# Altium PCB PCB1_2.pcbdoc (part 2 of 2)
Units mil, origin at the board's own origin, x right, y up, seen from the top; angles counter-clockwise.
Board outline 3210 x 4490.62 mil, 2 copper layers (Top Layer, Bottom Layer); 32 components, 15 nets, 80 pads, 138 vias.
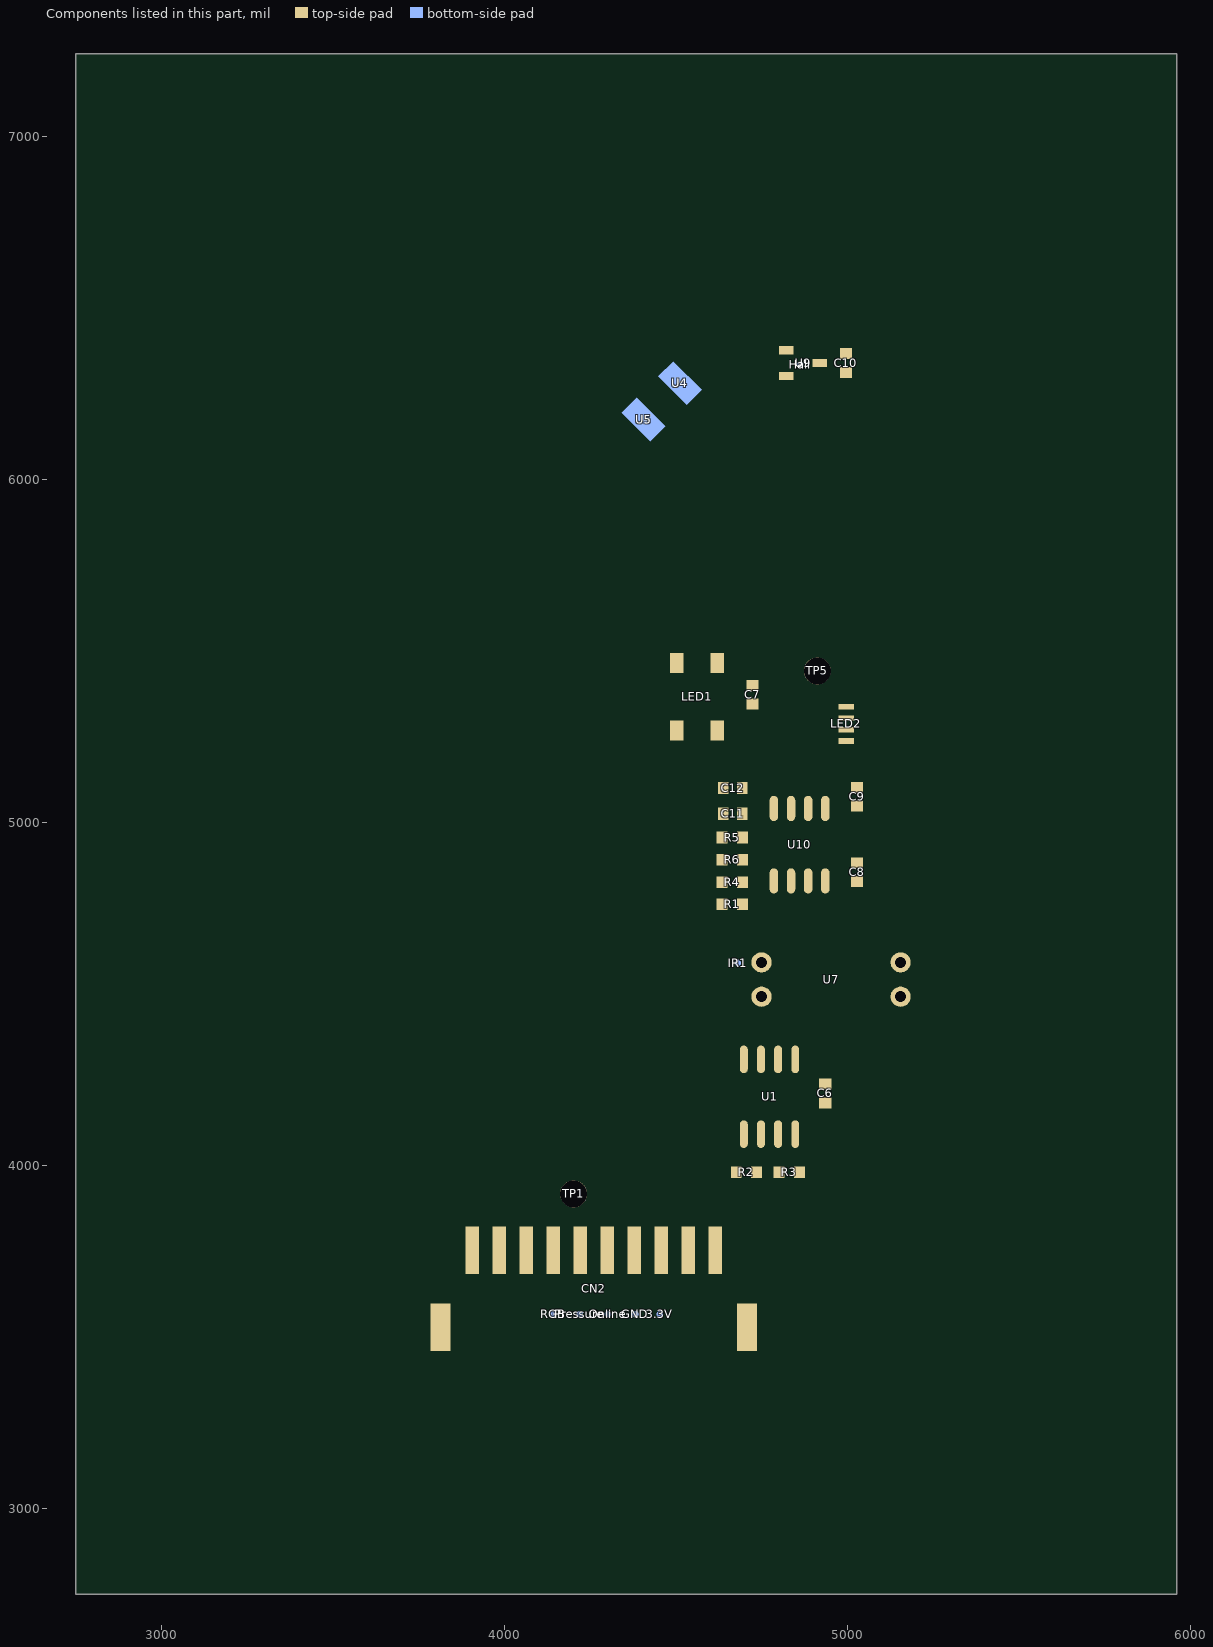
[diagram p2: the components of this part, seen from the top]

## Other copper (continued)
Bottom Layer:
  region net GND: 5114.28,4586.73 5114.28,4596.73 5116.54,4596.83 5118.49,4597.12 5120.17,4597.58 5121.61,4598.2 5122.86,4598.98 5123.96,4599.89 5125.83,4602.09 5129.44,4607.58 5131.81,4610.68 5133.26,4612.27 5134.95,4613.88 5134.95,4569.58 5133.26,4571.19 5131.81,4572.78 5129.44,4575.88 5125.83,4581.37 5123.96,4583.57 5122.86,4584.48 5121.61,4585.26 5120.17,4585.88 5118.49,4586.34 5116.54,4586.63
  region net 3.3V: 4900,3994.53 4920,3994.53 4920.09,3991.88 4920.31,3989.38 4921,3985 4921.69,3981.78 4922.01,3980.12 4897.99,3980.12 4898.31,3981.78 4899,3985 4899.69,3989.38 4899.91,3991.88
  region net 3.3V: 4920,3965.71 4900,3965.71 4899.91,3968.36 4899.69,3970.86 4899,3975.24 4898.31,3978.46 4897.99,3980.12 4922.01,3980.12 4921.69,3978.46 4921,3975.24 4920.31,3970.86 4920.09,3968.36
  region net 3.3V: 4900.09,4389.06 4891.91,4368.95 4890.95,4370.07 4890.18,4371.23 4888.89,4373.32 4888.22,4374.09 4887.45,4374.55 4886.5,4374.62 4885.29,4374.22 4890.31,4391.16 4890.8,4390.47 4891.32,4389.99 4891.86,4389.68 4892.42,4389.52 4893.6,4389.54 4894.83,4389.83 4896.11,4390.15 4897.43,4390.27 4898.76,4389.99 4899.42,4389.62
  region net 3.3V: 4855.18,4395 4855.18,4375 4852.54,4374.91 4850.03,4374.69 4845.65,4374 4842.43,4373.31 4840.77,4372.99 4840.77,4397.01 4842.43,4396.69 4845.65,4396 4850.03,4395.31 4852.54,4395.09
  region net 3.3V: 4865.59,4375 4865.59,4395 4868.24,4395.09 4870.74,4395.31 4875.12,4396 4878.34,4396.69 4880,4397.01 4880,4372.99 4878.34,4373.31 4875.12,4374 4870.74,4374.69 4868.24,4374.91
  region net GND: 4852.56,4962.14 4842.56,4962.14 4842.47,4963.27 4842.22,4964.41 4841.31,4966.62 4840.02,4968.7 4838.55,4970.54 4856.57,4970.54 4855.1,4968.7 4853.81,4966.62 4852.9,4964.41 4852.65,4963.27
  region net GND: 4842.56,4994.83 4852.56,4994.83 4852.65,4993.69 4852.9,4992.56 4853.81,4990.34 4855.1,4988.27 4856.57,4986.43 4838.55,4986.43 4840.02,4988.27 4841.31,4990.34 4842.22,4992.56 4842.47,4993.69
  region net GND: 4882.56,4586.73 ccw(c4882.56,4536.73) 4852.56,4576.73 4847.56,4591.73 4852.56,4606.73 ccw(c4882.56,4646.73) 4882.56,4596.73
  region net HALL_OUT: 4837.72,6340 4837.72,6330 4836.59,6329.91 4835.45,6329.66 4833.24,6328.75 4831.16,6327.47 4829.32,6325.99 4829.32,6344.01 4831.16,6342.53 4833.24,6341.25 4835.45,6340.34 4836.59,6340.09
  region net HALL_OUT: 4848.81,6330 4848.96,6340 4850.7,6340.17 4852.6,6340.66 4854.4,6341.4 4855.85,6342.35 4855.7,6327.58 4854.26,6328.55 4852.45,6329.32 4850.55,6329.82
  region net 3.3V: 4826.36,4375 4826.36,4395 4829.01,4395.09 4831.51,4395.31 4835.89,4396 4839.11,4396.69 4840.77,4397.01 4840.77,4372.99 4839.11,4373.31 4835.89,4374 4831.51,4374.69 4829.01,4374.91
  region net 3.3V: 4814.41,4395 4814.41,4375 4811.76,4374.91 4809.26,4374.69 4804.88,4374 4801.66,4373.31 4800,4372.99 4800,4397.01 4801.66,4396.69 4804.88,4396 4809.26,4395.31 4811.76,4395.09
  region net 3.3V: 4813,5298.65 4807,5298.65 4806.87,5300.18 4806.48,5301.4 4805.89,5302.41 4805.12,5303.28 4803.2,5304.95 4800.99,5307.06 4819.01,5307.06 4816.8,5304.95 4814.88,5303.28 4814.11,5302.41 4813.52,5301.4 4813.13,5300.18
  region net 3.3V: 4807,4770.76 4813,4770.76 4813.13,4769.24 4813.52,4768.01 4814.11,4767.01 4814.88,4766.14 4816.8,4764.47 4819.01,4762.36 4800.99,4762.36 4803.2,4764.47 4805.12,4766.14 4805.89,4767.01 4806.48,4768.01 4806.87,4769.24
  region net 3.3V: 4815,4738.07 4805,4738.07 4804.91,4739.21 4804.66,4740.34 4803.75,4742.56 4802.47,4744.63 4800.99,4746.47 4819.01,4746.47 4817.53,4744.63 4816.25,4742.56 4815.34,4740.34 4815.09,4739.21
  region net MCU_SCL: 4803,4013.65 4797,4013.65 4796.87,4015.18 4796.48,4016.4 4795.89,4017.41 4795.12,4018.28 4793.2,4019.95 4790.99,4022.06 4809.01,4022.06 4806.8,4019.95 4804.88,4018.28 4804.11,4017.41 4803.52,4016.4 4803.13,4015.18
  region net K_ONLINE: 4790,4928.65 4780,4928.65 4779.91,4929.79 4779.66,4930.92 4778.75,4933.14 4777.47,4935.21 4775.99,4937.06 4794.01,4937.06 4792.53,4935.21 4791.25,4933.14 4790.34,4930.92 4790.09,4929.79
  region net GND: 4789.18,4496.73 4789.18,4486.73 4786.92,4486.63 4784.97,4486.34 4783.29,4485.88 4781.85,4485.26 4780.6,4484.48 4779.5,4483.57 4777.63,4481.37 4774.02,4475.88 4771.65,4472.78 4770.2,4471.19 4768.51,4469.58 4768.51,4513.88 4770.2,4512.27 4771.65,4510.68 4774.02,4507.58 4777.63,4502.09 4779.5,4499.89 4780.6,4498.98 4781.85,4498.2 4783.29,4497.58 4784.97,4497.12 4786.92,4496.83
  region net 3.3V: 4784.73,4391.61 4790.61,4399.87 4791.48,4399.14 4792.49,4398.52 4794.79,4397.61 4797.26,4397.11 4799.63,4397 4788.14,4383.13 4787.71,4385.42 4787.06,4387.69 4786.11,4389.8 4785.48,4390.75
  region net MCU_SDA: 4748,4013.65 4742,4013.65 4741.87,4015.18 4741.48,4016.4 4740.89,4017.41 4740.12,4018.28 4738.2,4019.95 4735.99,4022.06 4754.01,4022.06 4751.8,4019.95 4749.88,4018.28 4749.11,4017.41 4748.52,4016.4 4748.13,4015.18
  region net GND: 4761.53,5285.35 4750.93,5295.95 4752.66,5297.58 4754.17,5299.09 4754.79,5299.9 4755.29,5300.79 4755.63,5301.8 4755.8,5302.96 4768.54,5290.23 4767.38,5290.05 4766.37,5289.71 4765.48,5289.22 4764.67,5288.6 4763.16,5287.08
  region net IR1_RECV: 4693.08,4593 4693.08,4587 4691.93,4586.9 4690.95,4586.62 4690.1,4586.19 4689.32,4585.63 4686.19,4582.62 4686.19,4597.38 4689.32,4594.37 4690.1,4593.81 4690.95,4593.38 4691.93,4593.1
  region net IR1_RECV: 4710.1,4587 4707.51,4593 4709.94,4593.11 4712,4593.44 4713.76,4593.97 4715.24,4594.69 4716.5,4595.58 4717.58,4596.64 4718.52,4597.83 4719.36,4599.15 4722.73,4605.46 4725.01,4609.02 4726.46,4610.85 4728.18,4612.7 4730.77,4568.48 4728.5,4570.6 4726.1,4573.32 4721.04,4579.47 4718.39,4582.36 4715.67,4584.76 4714.29,4585.69 4712.91,4586.39 4711.51,4586.84
  region net RGB_OUT: 4614.54,5176.88 4607.46,5183.95 4608.12,5184.74 4608.52,5185.49 4608.71,5186.25 4608.76,5187.02 4608.64,5188.72 4608.6,5190.75 4621.33,5178.02 4619.3,5178.06 4617.6,5178.18 4616.83,5178.13 4616.08,5177.94 4615.32,5177.54
  region net MOTOR_LOUT: 4539.14,3883.02 4536.16,3903.02 4539.38,3902.95 4542.32,3903.05 4543.69,3903.31 4544.99,3903.78 4546.21,3904.52 4547.36,3905.59 4550.34,3881.78 4548.93,3882.59 4547.61,3883.09 4546.33,3883.33 4545.04,3883.39 4542.32,3883.19
  region net 3.3V: 4471,3660 4471,3640 4468.36,3639.91 4465.85,3639.69 4461.47,3639 4458.25,3638.31 4456.59,3637.99 4456.59,3662.01 4458.25,3661.69 4461.47,3661 4465.85,3660.31 4468.36,3660.09
  region net MOTOR_HOUT: 4535.33,3953.22 4515.33,3953.22 4515.44,3956.38 4515.44,3959.24 4515.26,3960.58 4514.89,3961.88 4514.27,3963.16 4513.33,3964.42 4537.33,3964.42 4536.4,3963.16 4535.77,3961.88 4535.4,3960.58 4535.23,3959.24 4535.23,3956.38
  region net MOTOR_HOUT: 4515.33,3946.78 4535.33,3946.78 4535.23,3943.62 4535.23,3940.76 4535.4,3939.42 4535.77,3938.12 4536.4,3936.84 4537.33,3935.58 4513.33,3935.58 4514.27,3936.84 4514.89,3938.12 4515.26,3939.42 4515.44,3940.76 4515.44,3943.62
  region net 3.3V: 4446.59,3629.41 4466.59,3629.41 4466.68,3626.76 4466.91,3624.26 4467.6,3619.88 4468.29,3616.66 4468.6,3615 4444.59,3615 4444.9,3616.66 4445.59,3619.88 4446.28,3624.26 4446.51,3626.76
  region net 3.3V: 4466.59,3635.59 4446.59,3635.59 4446.51,3638.24 4446.28,3640.74 4445.59,3645.12 4444.9,3648.34 4444.59,3650 4468.6,3650 4468.29,3648.34 4467.6,3645.12 4466.91,3640.74 4466.68,3638.24
  region net 3.3V: 4466.59,3600.59 4446.59,3600.59 4446.51,3603.24 4446.28,3605.74 4445.59,3610.12 4444.9,3613.34 4444.59,3615 4468.6,3615 4468.29,3613.34 4467.6,3610.12 4466.91,3605.74 4466.68,3603.24
  region net 3.3V: 4446.59,3578.72 4466.59,3578.94 4466.5,3578.29 4466.23,3577.71 4465.31,3576.72 4464.04,3575.91 4462.65,3575.2 4461.37,3574.54 4460.42,3573.84 4460.14,3573.45 4460.02,3573.03 4460.11,3572.57 4460.41,3572.05 4444.75,3571.84 4445.59,3573.35 4446.16,3575.12 4446.49,3576.97
  region net GND: 4367.85,3629.41 4387.85,3629.41 4387.94,3626.76 4388.17,3624.26 4388.86,3619.88 4389.55,3616.66 4389.86,3615 4365.85,3615 4366.16,3616.66 4366.85,3619.88 4367.54,3624.26 4367.77,3626.76
  region net GND: 4387.85,3635.59 4367.85,3635.59 4367.77,3638.24 4367.54,3640.74 4366.85,3645.12 4366.16,3648.34 4365.85,3650 4389.86,3650 4389.55,3648.34 4388.86,3645.12 4388.17,3640.74 4387.94,3638.24
  region net GND: 4387.85,3600.59 4367.85,3600.59 4367.77,3603.24 4367.54,3605.74 4366.85,3610.12 4366.16,3613.34 4365.85,3615 4389.86,3615 4389.55,3613.34 4388.86,3610.12 4388.17,3605.74 4387.94,3603.24
  region net GND: 4367.85,3579.47 4387.85,3578.15 4387.96,3576.44 4388.28,3574.59 4388.81,3572.79 4389.56,3571.26 4373.95,3572.58 4374.26,3573.04 4374.35,3573.47 4374.24,3573.87 4373.96,3574.25 4373.03,3574.98 4371.76,3575.7 4370.39,3576.46 4369.13,3577.31 4368.21,3578.3 4367.95,3578.86
  region net K_ONLINE: 4307.14,3665.1 4314.21,3658.02 4313.47,3657.16 4312.85,3656.17 4311.92,3653.97 4311.36,3651.59 4311.1,3649.25 4298.36,3661.98 4300.71,3662.25 4303.08,3662.81 4305.29,3663.73 4306.27,3664.35
  region net K_ONLINE: 4309.11,3635.59 4289.11,3635.59 4289.03,3638.24 4288.8,3640.74 4288.11,3645.12 4287.42,3648.34 4287.11,3650 4311.12,3650 4310.81,3648.34 4310.12,3645.12 4309.43,3640.74 4309.2,3638.24
  region net K_ONLINE: 4289.11,3629.41 4309.11,3629.41 4309.2,3626.76 4309.43,3624.26 4310.12,3619.88 4310.81,3616.66 4311.12,3615 4287.11,3615 4287.42,3616.66 4288.11,3619.88 4288.8,3624.26 4289.03,3626.76
  region net K_ONLINE: 4309.11,3600.59 4289.11,3600.59 4289.03,3603.24 4288.8,3605.74 4288.11,3610.12 4287.42,3613.34 4287.11,3615 4311.12,3615 4310.81,3613.34 4310.12,3610.12 4309.43,3605.74 4309.2,3603.24
  region net K_ONLINE: 4289.11,3580.73 4309.11,3576.49 4309.22,3574.89 4309.51,3573 4309.92,3571.13 4310.41,3569.6 4295.33,3573.84 4295.64,3574.18 4295.73,3574.52 4295.61,3574.88 4295.33,3575.25 4294.38,3576.03 4293.09,3576.86 4291.69,3577.74 4290.41,3578.68 4289.48,3579.68 4289.21,3580.2
  region net K_PULL: 4228.4,3665.1 4235.47,3658.02 4234.73,3657.16 4234.11,3656.17 4233.18,3653.97 4232.62,3651.59 4232.36,3649.25 4219.62,3661.98 4221.97,3662.25 4224.34,3662.81 4226.55,3663.73 4227.53,3664.35
  region net GND: 4226.44,3510 4226.44,3490 4223.79,3489.91 4221.29,3489.69 4216.91,3489 4213.69,3488.31 4212.03,3487.99 4212.03,3512.01 4213.69,3511.69 4216.91,3511 4221.29,3510.31 4223.79,3510.09
  region net K_PULL: 4230.37,3600.59 4210.37,3600.59 4210.29,3603.24 4210.06,3605.74 4209.37,3610.12 4208.68,3613.34 4208.37,3615 4232.38,3615 4232.07,3613.34 4231.38,3610.12 4230.69,3605.74 4230.46,3603.24
  region net K_PULL: 4210.37,3575.22 4230.37,3581.46 4230.27,3580.96 4229.99,3580.46 4229.02,3579.45 4226.2,3577.51 4224.84,3576.62 4223.83,3575.82 4223.39,3575.13 4223.46,3574.83 4223.77,3574.57 4209.4,3568.33 4210.07,3571.75
  region net K_PULL: 4230.37,3635.59 4210.37,3635.59 4210.29,3638.24 4210.06,3640.74 4209.37,3645.12 4208.68,3648.34 4208.37,3650 4232.38,3650 4232.07,3648.34 4231.38,3645.12 4230.69,3640.74 4230.46,3638.24
  region net K_PULL: 4210.37,3629.41 4230.37,3629.41 4230.46,3626.76 4230.69,3624.26 4231.38,3619.88 4232.07,3616.66 4232.38,3615 4208.37,3615 4208.68,3616.66 4209.37,3619.88 4210.06,3624.26 4210.29,3626.76
  region net RGB_OUT: 4149.66,3665.1 4156.73,3658.02 4155.99,3657.16 4155.37,3656.17 4154.44,3653.97 4153.88,3651.59 4153.62,3649.25 4140.88,3661.98 4143.23,3662.25 4145.6,3662.81 4147.81,3663.73 4148.79,3664.35
  region net GND: 4197.62,3490 4197.62,3510 4200.27,3510.09 4202.77,3510.31 4207.15,3511 4210.37,3511.69 4212.03,3512.01 4212.03,3487.99 4210.37,3488.31 4207.15,3489 4202.77,3489.69 4200.27,3489.91
  region net GND: 4191.44,3510 4191.44,3490 4188.79,3489.91 4186.29,3489.69 4181.91,3489 4178.69,3488.31 4177.03,3487.99 4177.03,3512.01 4178.69,3511.69 4181.91,3511 4186.29,3510.31 4188.79,3510.09
  region net GND: 4169.53,3516.35 4184.53,3516.35 4184.45,3513.97 4184.45,3511.83 4184.59,3510.82 4184.87,3509.84 4185.33,3508.89 4186.03,3507.94 4168.02,3507.94 4168.72,3508.89 4169.19,3509.84 4169.47,3510.82 4169.61,3511.83 4169.61,3513.97
  region net GND: 4066.01,3667.26 4080.15,3653.12 4078.34,3651.19 4076.73,3649.25 4074.12,3645.67 4072.34,3642.9 4071.38,3641.51 4054.4,3658.49 4055.8,3659.44 4058.56,3661.23 4062.15,3663.84 4064.08,3665.45
  region net RGB_OUT: 4131.63,3629.41 4151.63,3629.41 4151.72,3626.76 4151.95,3624.26 4152.64,3619.88 4153.33,3616.66 4153.64,3615 4129.63,3615 4129.94,3616.66 4130.63,3619.88 4131.32,3624.26 4131.55,3626.76
  region net RGB_OUT: 4151.63,3635.59 4131.63,3635.59 4131.55,3638.24 4131.32,3640.74 4130.63,3645.12 4129.94,3648.34 4129.63,3650 4153.64,3650 4153.33,3648.34 4152.64,3645.12 4151.95,3640.74 4151.72,3638.24
  region net RGB_OUT: 4151.63,3600.59 4131.63,3600.59 4131.55,3603.24 4131.32,3605.74 4130.63,3610.12 4129.94,3613.34 4129.63,3615 4153.64,3615 4153.33,3613.34 4152.64,3610.12 4151.95,3605.74 4151.72,3603.24
  region net RGB_OUT: 4131.63,3573.25 4151.63,3582.49 4151.52,3582.06 4151.19,3581.59 4150.04,3580.56 4146.69,3578.4 4143.74,3576.57 4143.08,3575.94 4143.08,3575.73 4143.34,3575.6 4131.42,3566.36
  region net GND: 4162.62,3490 4162.62,3510 4165.27,3510.09 4167.77,3510.31 4172.15,3511 4175.37,3511.69 4177.03,3512.01 4177.03,3487.99 4175.37,3488.31 4172.15,3489 4167.77,3489.69 4165.27,3489.91
  region net GND: 4072.89,3600.59 4052.89,3600.59 4052.81,3603.24 4052.58,3605.74 4051.89,3610.12 4051.2,3613.34 4050.89,3615 4074.9,3615 4074.59,3613.34 4073.9,3610.12 4073.21,3605.74 4072.98,3603.24
  region net GND: 4052.89,3629.41 4072.89,3629.41 4072.98,3626.76 4073.21,3624.26 4073.9,3619.88 4074.59,3616.66 4074.9,3615 4050.89,3615 4051.2,3616.66 4051.89,3619.88 4052.58,3624.26 4052.81,3626.76
  region net GND: 4072.89,3635.59 4052.89,3635.59 4052.81,3638.24 4052.58,3640.74 4051.89,3645.12 4051.2,3648.34 4050.89,3650 4074.9,3650 4074.59,3648.34 4073.9,3645.12 4073.21,3640.74 4072.98,3638.24
  region net MCU_SDA: 3987.15,3598.65 3981.15,3598.65 3981.02,3600.18 3980.64,3601.4 3980.04,3602.41 3979.28,3603.28 3977.35,3604.95 3975.15,3607.06 3993.16,3607.06 3990.95,3604.95 3989.03,3603.28 3988.26,3602.41 3987.67,3601.4 3987.29,3600.18
  region net MCU_SDA: 3974.15,3629.41 3994.15,3629.41 3994.24,3626.76 3994.47,3624.26 3995.16,3619.88 3995.85,3616.66 3996.16,3615 3972.15,3615 3972.46,3616.66 3973.15,3619.88 3973.84,3624.26 3974.07,3626.76
  region net MCU_SDA: 3994.15,3635.59 3974.15,3635.59 3974.07,3638.24 3973.84,3640.74 3973.15,3645.12 3972.46,3648.34 3972.15,3650 3996.16,3650 3995.85,3648.34 3995.16,3645.12 3994.47,3640.74 3994.24,3638.24
  region net MCU_SCL: 3919.04,3605.2 3914.49,3601.27 3913.31,3602.26 3912.18,3602.86 3911.07,3603.15 3909.93,3603.22 3907.42,3603.05 3905.98,3602.98 3904.37,3603.04 3917.41,3615.46 3917.29,3612.41 3917.1,3609.84 3917.18,3608.66 3917.47,3607.51 3918.07,3606.37
  region net MCU_SCL: 3915.41,3635.59 3895.41,3635.59 3895.33,3638.24 3895.1,3640.74 3894.41,3645.12 3893.72,3648.34 3893.41,3650 3917.42,3650 3917.11,3648.34 3916.42,3645.12 3915.73,3640.74 3915.5,3638.24
  region net MCU_SCL: 3895.41,3629.41 3915.41,3629.41 3915.5,3626.76 3915.73,3624.26 3916.42,3619.88 3917.11,3616.66 3917.42,3615 3893.41,3615 3893.72,3616.66 3894.41,3619.88 3895.1,3624.26 3895.33,3626.76

## Silkscreen, mask and mechanical layers (free items; w line width, h text height)
Top Silkscreen Layer:
  region: 4980.5,5040 ccw(c4970,5039.86) 4959.5,5040 ccw(c4970,5040.14)
  region: 4417.1,5201.26 4417.1,5275.11 4486.44,5201.26
Bottom Silkscreen Layer:
  text "+ M -" at 4642.51,6215.43 h69 r315
  text "M2" at 4810,5440 h60
  text "M2" at 4334.96,3810.82 h60
  text "Pressure" at 4230,3410 h45 r90
  text "Online" at 4280,3410 h45 r90
Mech6:
  drawing of 475 lines, arcs and shapes, not listed